# Altium PCB STM_System_Board.PCBDOC (part 5 of 16)
Units mm, origin at the board's own origin, x right, y up, seen from the top; angles counter-clockwise.
Board outline 222.53 x 100.01 mm, 6 copper layers (Top Layer, Int1 (GND), Int2 (Sign), Layer 1, Layer 2, Bottom Layer), stack 1.526 mm thick; 702 components, 774 nets, 3596 pads, 1988 vias.
Unrouted connection lines stored in the file: 1.
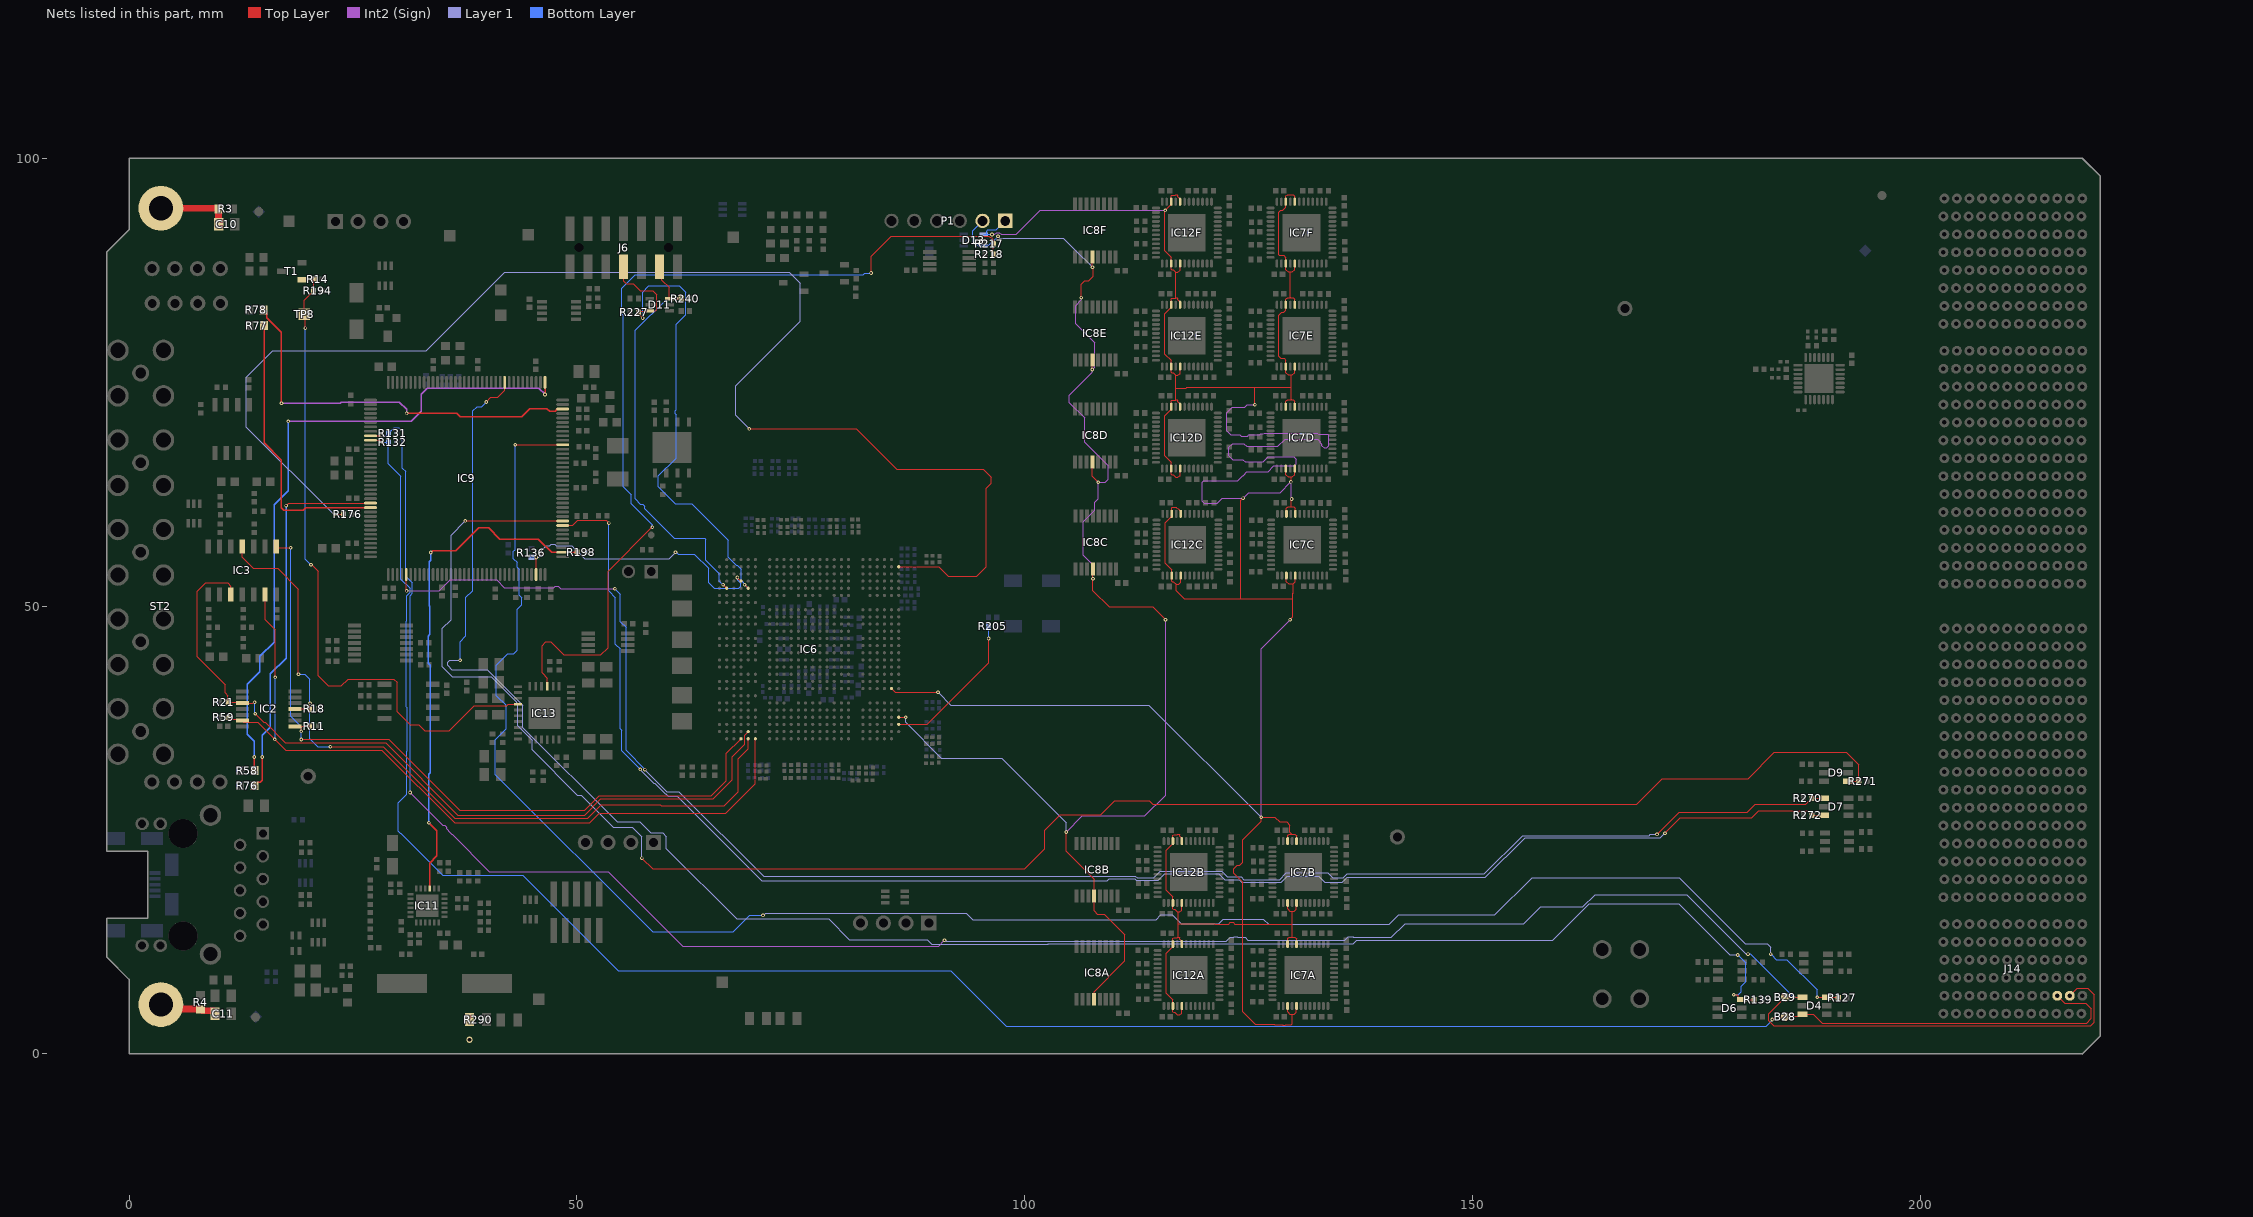
[diagram p8: the nets of this part, all layers, seen from the top]

## Via types
v1: diameter 0.4, hole 0.2, Top Layer to Bottom Layer, tented both sides, 1806 vias
v2: diameter 0.7, hole 0.4, Top Layer to Bottom Layer, tented both sides, 92 vias
v3: diameter 0.7, hole 0.4, Top Layer to Bottom Layer, 90 vias

## Nets (pads, with @x,y where several pads share a name; then routed paths per layer and width w, separated by ;. In a path a pad name is that pad's centre, name@x,y a point inside that pad or via, vN(x,y) a via of type N, cw(c..) or ccw(c..) an arc to the next point about the centre after c; other vN are vias at no path point) (continued)
CFG_TDO: D11.6 IC6.AB5 J6.8 R227.1 | length 58.9
  Top Layer w0.127: J6.8@55.213,87.882 55.213,86.265 55.499,85.979 56.261,85.979 57.04,85.2 58.438,85.2 58.9,84.738 58.9,83.1 58.782,82.982 D11.6@58.129,82.982 ; v1(57.325,82.15) 57.072,82.403 57.072,82.59 R227.1@56.858,82.804 56.985,82.931 D11.6@57.88,82.931 ; D11.6@57.794,82.845 D11.6@57.88,82.931 ; v1(68.715,52.384) IC6.AB5@69.115,51.984 ; D11.6@57.88,82.931 58.078,82.931 D11.6@58.129,82.982 ; D11.6@57.88,82.931 57.931,82.982 D11.6@58.129,82.982
  Bottom Layer w0.127: v1(57.325,82.15) 57.325,85.05 58,85.725 61.425,85.725 62.15,85 62.15,82.525 61.087,81.462 61.087,71.904 60.973,71.79 60.973,71.466 61.087,71.352 61.087,66.512 59.1,64.525 59.1,63.293 60.985,61.409 62.817,61.409 66.88,57.345 66.88,55.47 67.775,54.575 67.876,54.575 68.163,54.288 68.324,54.127 68.324,52.886 68.559,52.651 68.559,52.613 68.715,52.458 v1(68.715,52.384)
CFG_TMS: D11.3 IC6.AE5 J6.4 R240.2 | length 46.6
  Top Layer w0.127: J6.4@59.213,87.882 59.459,87.637 59.459,86.391 60.275,85.575 60.275,84.336 D11.3@60.329,84.282 61.587,84.282 R240.2@61.633,84.328 ; v1(66.315,52.384) IC6.AE5@66.715,51.984
  Bottom Layer w0.127: v1(61.087,84.328) 60.055,84.328 56.5,80.773 56.5,61.95 57.068,61.382 57.35,61.382 57.578,61.153 57.578,60.872 60.882,57.568 64.252,57.568 64.375,57.445 64.375,55.125 65.905,53.595 65.905,52.794 v1(66.315,52.384)
CHASSIS: C10.1 C11.1 R3.2 R4.2 R290.2 ST2.0 ST2.1 | length 14.8
  Top Layer w0.762: ST2.0@3.556,5.512 4.049,5.019 7.931,5.019 R4.2@8,4.95 8.05,4.95 8.181,4.819 9.456,4.819 9.6,4.675 C11.1@9.6,4.5 ; ST2.1@3.556,94.412 9.926,94.412 9.995,94.343 R3.2@9.995,94.336 ; C10.1@9.996,92.609 R3.2@9.995,94.336
  other v2: 38.005,1.575
CLK_FPGA: IC6.A24 R205.2 | length 17
  Top Layer w0.127: IC6.A24@85.915,36.784 89.075,36.784 95.95,43.659 v1(95.95,46.375)
  Bottom Layer w0.127: R205.2@95.945,47.747 95.945,46.38 v1(95.95,46.375)
CLK_STM: IC6.A2 R176.1 | length 157.7
  Top Layer w0.127: v1(23.05,60.25) R176.1@23.93,60.25 ; v1(69.225,69.775) 69.25,69.8 81.175,69.8 85.7,65.275 95.376,65.275 96.266,64.385 96.266,63.716 95.675,63.125 95.675,54.4 94.84,53.565 94.84,53.538 94.612,53.309 94.288,53.309 94.273,53.325 91.425,53.325 90.366,54.384 IC6.A2@85.915,54.384
  Layer 1 w0.127: v1(23.05,60.25) 23.026,60.274 22.776,60.274 13.075,69.975 13.075,75.525 16.05,78.5 33.15,78.5 41.925,87.275 73.675,87.275 74.925,86.025 74.925,81.775 67.725,74.575 67.725,71.275 v1(69.225,69.775)
CPCIS_BUS_PRST_N: D6.3 IC9.46 R139.1 | length 207.3
  Top Layer w0.127: v1(39.878,72.771) 40.386,73.279 41.148,73.279 41.935,74.066 IC9.46@41.935,74.971 ; v1(179.125,6.6) 179.495,6.6 179.604,6.491 179.604,6.312 179.84,6.075 R139.1@181.403,6.075
  Layer 1 w0.127: v1(36.957,43.942) 36.948,43.951 35.779,43.951 35.551,43.723 35.551,43.399 36.046,42.904 39.98,42.904 43.971,38.913 43.971,36.429 54.504,25.896 56.988,25.896 58.209,24.675 59.55,24.675 59.975,24.25 59.975,22.909 67.812,15.072 78.078,15.072 80.375,12.775 89.1,12.775 89.616,12.259 102.596,12.259 102.628,12.291 136.637,12.291 137.047,12.7 158.928,12.7 162.992,16.764 172.974,16.764 178.689,11.049 v1(179.578,11.049)
  Bottom Layer w0.127: v1(36.957,43.942) 36.957,46.032 37.6,46.675 37.6,50.957 38.354,51.711 38.354,53.213 38.39,53.249 38.39,71.791 38.862,72.263 39.37,72.263 v1(39.878,72.771) ; v1(179.125,6.6) 179.612,6.6 179.959,6.947 179.959,7.566 180.467,8.074 180.467,10.16 v1(179.578,11.049)
CPCIS_BUS_RST_N: D4.6 IC9.26 R127.1 | length 213.2
  Top Layer w0.127: v1(43.104,67.996) IC9.26@48.41,67.996 ; v1(188.437,6.318) D4.6@189.511,6.318 190.741,6.318 R127.1@190.791,6.268
  Layer 1 w0.127: v1(70.764,15.462) 70.835,15.462 71.073,15.7 93.444,15.7 94.154,14.99 114.662,14.99 115.188,15.516 116.434,15.516 117.434,14.516 121.616,14.516 122.125,15.025 126.625,15.025 127.197,14.453 140.665,14.453 141.757,15.545 152.476,15.545 156.616,19.685 173.036,19.685 180.402,12.319 182.88,12.319 183.261,11.938 v1(183.261,11.141)
  Bottom Layer w0.127: v1(43.104,67.996) 43.105,67.995 43.105,56.301 42.9,56.096 42.9,55.29 43.326,54.864 43.326,54.344 43.546,54.124 43.546,51.395 43.561,51.38 43.561,51.181 43.815,50.927 43.815,50.165 43.307,49.657 43.307,45.06 42.947,44.7 42.283,44.7 40.996,43.412 40.996,40.004 42.1,38.9 42.1,36.3 40.9,35.1 40.9,31.153 58.439,13.614 67.439,13.614 69.287,15.462 v1(70.764,15.462) ; v1(183.261,11.141) 183.296,11.141 183.896,10.541 185.039,10.541 188.437,7.143 v1(188.437,6.318)
CPCIS_I2C_SCL: B29.1 D4.1 IC9.81 J14.B2 R131.2 | length 262.8
  Top Layer w0.127: IC9.81@26.96,68.996 28.153,68.996 v1(28.169,69.012) ; D4.1@186.811,6.318 v1(185.836,6.318) B29.1@184.861,6.318 183.035,4.492 183.035,3.688 183.573,3.15 218.973,3.15 219.354,3.531 219.354,6.629 218.643,7.341 217.479,7.341 J14.B2@216.639,6.5
  Int2 (Sign) w0.127: v1(31.369,29.185) 35.017,25.536 35.214,25.536 35.442,25.308 35.442,25.111 35.805,24.749 35.805,24.73 36.033,24.502 36.052,24.502 40.234,20.32 53.518,20.32 61.798,12.04 90.365,12.04 v1(91.025,12.7)
  Layer 1 w0.127: v1(91.025,12.7) 91.099,12.7 91.228,12.571 122.502,12.571 122.936,13.005 123.309,13.005 123.376,13.072 123.699,13.072 123.766,13.005 124.587,13.005 124.892,12.7 135.712,12.7 136.084,13.072 136.637,13.072 136.679,13.03 140.919,13.03 142.443,14.554 155.702,14.554 157.556,16.408 162.277,16.408 163.649,17.78 173.863,17.78 180.467,11.176 180.686,11.176 v1(180.721,11.141)
  Bottom Layer w0.127: v1(28.169,69.012) 28.678,69.012 28.708,69.042 28.728,69.042 28.954,69.268 R131.2@28.954,69.288 28.954,69.308 29.181,69.535 29.201,69.535 29.592,69.926 30.126,69.926 30.48,69.572 30.48,65.405 30.861,65.024 30.861,53.34 31.623,52.578 31.623,51.422 31.369,51.168 v1(31.369,29.185) ; v1(180.721,11.141) 180.756,11.176 180.978,11.176 v1(185.836,6.318)
CPCIS_I2C_SDA: B28.1 D4.3 IC9.82 J14.C2 R132.2 | length 251.8
  Top Layer w0.127: IC9.82@26.96,68.496 28.024,68.496 28.229,68.292 v1(28.235,68.292) ; v1(183.425,3.85) 183.743,4.168 185.788,4.168 185.801,4.182 186.575,4.182 D4.3@186.811,4.418 188.021,4.418 188.985,3.454 218.516,3.454 219.024,3.962 219.024,5.029 218.415,5.639 216.1,5.639 J14.C2@215.239,6.5
  Bottom Layer w0.127: v1@28.228,68.292 v1(28.235,68.292) 28.239,68.288 R132.2@28.954,68.288 28.954,65.864 30.353,64.465 30.353,53.003 31.369,51.987 31.369,51.527 30.997,51.156 30.997,48.352 30.963,48.317 30.963,38.772 31.047,38.687 31.047,33.864 30.979,33.795 30.979,28.972 30.064,28.058 30.064,24.857 30.293,24.629 30.341,24.629 33.162,21.808 35.03,19.939 43.967,19.939 54.635,9.271 91.745,9.271 97.942,3.073 182.748,3.073 183.326,3.651 183.326,3.677 183.425,3.776 v1(183.425,3.85)
CPU_RESETn: IC13.26 R14.2 R194.1 T1.1 TP8.1 | length 75.4
  Top Layer w0.127: T1.1@19.311,86.426 20.551,86.426 R14.2@20.612,86.487 20.612,85.226 R194.1@20.597,85.21 20.597,85.19 19.558,84.152 TP8.1@19.558,82.55 19.685,82.423 v1(19.685,81.026) ; v1(20.311,54.61) 20.384,54.61 21.107,53.887 21.107,42.221 22.239,41.089 23.714,41.089 24.475,41.85 29.55,41.85 29.925,41.475 29.925,38.205 31.38,36.75 32.325,36.75 33.025,36.05 35.725,36.05 38.537,38.862 42.164,38.862 42.352,39.05 IC13.26@43.409,39.05
  Bottom Layer w0.127: v1(19.685,81.026) 19.685,55.236 v1(20.311,54.61)
CS: D13.3 IC6.A23 IC8A.12 IC8B.12 IC8C.12 IC8D.12 IC8E.12 IC8F.12 P1.2 | length 157
  Top Layer w0.127: IC6.A23@85.915,37.584 v1(86.7,37.584) ; v1(104.625,24.775) 104.625,22.629 107.725,19.529 IC8B.12@107.725,17.606 107.725,15.973 108.077,15.621 108.854,15.621 111.175,13.3 111.175,10.4 107.725,6.95 IC8A.12@107.725,6.106 ; v1(106.3,84.431) 106.3,85.925 106.685,86.31 107.138,86.31 107.625,86.797 107.625,87.614 ; IC8D.12@107.529,66.094 107.529,64.496 v1(108.2,63.825) ; v1@107.529,76.404 IC8E.12@107.529,77.479 ; IC8F.12@107.529,88.979 107.529,87.846 v1(107.55,87.825) ; v1@107.594,53.05 107.594,51.731 109.425,49.9 114.275,49.9 v1(115.7,48.475) ; v1@107.594,53.056 IC8C.12@107.594,54.146
  Int2 (Sign) w0.127: v1(104.625,24.775) 106.425,26.575 113.4,26.575 115.7,28.875 v1(115.7,48.475) ; v1(106.3,84.431) 106.3,84.175 105.65,83.525 105.65,81.5 107.788,79.363 107.788,76.663 v1(107.525,76.4) 107.525,76.075 104.975,73.525 104.975,72.7 106.675,71 106.675,68.3 109.3,65.675 109.3,64.15 108.975,63.825 v1(108.2,63.825) 108.204,63.821 108.204,61.951 107.825,61.572 107.825,60.683 106.528,59.385 106.528,55.651 107.594,54.585 v1@107.594,53.052
  Layer 1 w0.127: v1(86.7,37.584) 86.7,37 90.675,33.025 97.4,33.025 104.625,25.8 v1(104.625,24.775) ; v1@96.996,91.271 97.192,91.075 104.298,91.075 105.464,89.908 105.467,89.908 v1(107.55,87.825)
  Bottom Layer w0.127: P1.2@95.275,92.992 94.185,91.901 94.185,90.688 94.413,90.46 94.59,90.46 94.809,90.241 95.359,90.241 D13.3@95.4,90.2 95.466,90.266 95.991,90.266 v1(97,91.275)
  other v1: 107.6,53.05
DIO_OEn0: IC2.1 IC3.1 IC6.AC26 R11.2 | length 83.3
  Top Layer w0.127: IC3.1@16.451,56.666 16.602,56.515 v1(18.034,56.515) ; IC2.1@18.539,36.556 IC2.1@19.039,36.556 ; v1(19.215,35.105) 29.016,35.105 36.943,27.178 50.854,27.178 52.505,28.829 65.006,28.829 66.689,30.511 66.689,33.558 IC6.AC26@68.315,35.184 ; v1(19.215,36) 19.201,36.014 19.201,36.394 IC2.1@19.039,36.556 ; R11.2@20.199,36.601 20.154,36.556 IC2.1@19.039,36.556
  Bottom Layer w0.127: v1(18.034,56.515) 18.034,37.719 19.215,36.538 v1(19.215,36) v1(19.215,35.105)
DIO_OEn1: IC2.4 IC3.4 IC6.AB26 R18.2 | length 88.1
  Top Layer w0.127: IC3.4@12.641,56.666 12.641,55.431 13.843,54.229 16.574,54.229 18.913,51.89 v1(18.913,42.386) ; IC2.4@18.539,38.506 R18.2@20.199,38.506 v1(20.199,39.156) ; v1(22.479,34.29) 28.373,34.29 36.374,26.289 51.205,26.289 52.738,27.822 59.322,27.822 59.435,27.71 66.439,27.71 67.977,29.248 67.977,32.927 69.115,34.065 IC6.AB26@69.115,35.184
  Bottom Layer w0.127: v1(18.913,42.386) 19.621,42.386 20.199,41.808 v1(20.199,39.156) 20.199,35.173 21.082,34.29 v1(22.479,34.29)
DIO_OEn2: IC2.10 IC3.10 IC6.AB25 R21.2 | length 89.1
  Top Layer w0.127: IC3.10@11.371,51.266 11.371,52.231 11.024,52.578 8.565,52.578 7.62,51.633 7.62,44.323 10.732,41.211 10.732,40.32 11.044,40.008 R21.2@11.044,39.268 12.527,39.268 IC2.10@12.639,39.156 13.827,39.156 13.937,39.266 v1(14.011,39.266) ; v1(14.097,37.973) 15.042,37.028 15.181,37.028 17.449,34.76 18.23,34.76 18.276,34.715 28.652,34.715 36.697,26.67 50.854,26.67 52.675,28.491 65.22,28.491 67.327,30.598 67.327,33.152 68.725,34.55 68.725,35.594 IC6.AB25@69.115,35.984
  Bottom Layer w0.127: v1(14.011,39.266) 14.054,39.223 14.054,38.016 v1(14.097,37.973)
DIO_OEn3: IC2.13 IC3.13 IC6.AA26 R59.2 | length 87.3
  Top Layer w0.127: R59.2@11.056,37.577 11.266,37.367 12.478,37.367 IC2.13@12.639,37.206 12.801,37.044 14.344,37.044 17.479,33.909 22.308,33.909 22.317,33.9 22.641,33.9 22.65,33.909 28.206,33.909 36.334,25.781 51.411,25.781 52.478,26.848 66.623,26.848 69.915,30.14 IC6.AA26@69.915,35.184 ; IC3.13@15.181,51.266 15.181,48.474 16.324,47.331 v1(16.324,42.037)
  Bottom Layer w0.127: v1(16.275,35.109) 16.324,35.158 16.324,38.691 16.314,38.7 16.314,39.024 16.324,39.033 v1(16.324,42.037)
DONE: IC6.AC4 IC9.142 R136.2 | length 31.5
  Top Layer w0.127: IC9.142@45.435,53.521 45.451,53.537 45.451,55.406 v1(45.465,55.42) ; v1(67.915,53.184) IC6.AC4@68.315,52.784
  Layer 1 w0.127: v1(45.465,55.42) 45.517,55.472 45.71,55.472 46.002,55.764 46.002,56.177 46.55,56.725 46.973,56.725 47.138,56.89 47.537,56.89 47.702,56.725 49.399,56.725 49.517,56.607 49.518,56.607 50.85,55.275 60.275,55.275 v1(61,56)
  Bottom Layer w0.127: R136.2@44.924,55.449 44.953,55.42 v1(45.465,55.42) ; v1(61,56) 61.074,56 61.282,55.792 63.108,55.792 64.7,54.2 64.7,52.593 65.3,51.994 68.077,51.994 68.305,52.222 68.305,52.546 67.967,52.884 67.967,53.132 v1(67.915,53.184)
EN_PWR: IC13.19 R217.2 R218.2 | length 103.7
  Top Layer w0.127: IC13.19@46.697,41.037 46.697,41.949 46.101,42.545 46.101,45.576 46.525,46 47.1,46 48.519,44.581 49.056,44.581 49.098,44.539 52.667,44.539 53.467,45.339 53.467,53.902 58.366,58.801 v1(58.42,58.801) ; v1(82.829,87.173) 82.829,89.052 85.065,91.288 95.96,91.288 96.163,91.085 96.291,91.085 96.52,90.856 96.52,90.462 R217.2@96.482,90.424 R218.2@96.482,89.281
  Bottom Layer w0.127: v1(58.42,58.801) 58.41,58.811 58.41,59.09 56.075,61.426 56.075,62.401 55.175,63.3 55.175,82.449 54.975,82.649 54.975,85.455 56.515,86.995 81.966,86.995 82.144,87.173 v1(82.829,87.173)
ETH_PHY_NRST: IC9.2 IC11.15 R198.2 | length 57.2
  Top Layer w0.152: v1(33.477,25.806) 34.363,24.921 34.363,22.104 33.553,21.294 IC11.15@33.553,18.461 ; v1(33.673,55.977) 33.74,55.977 33.919,56.156 36.471,56.156 39.043,58.728 40.126,58.728 41.396,57.459 42.479,57.459 42.496,57.476 45.704,57.476 47.184,55.996 IC9.2@48.41,55.996 50.006,55.996 R198.2@50.012,56.002
  Bottom Layer w0.152: v1(33.477,25.806) 33.477,31.221 33.619,31.363 33.619,43.379 33.388,43.61 33.388,46.652 33.56,46.823 33.56,49.956 33.496,50.02 33.496,54.955 33.673,55.132 v1(33.673,55.977)
F_IO0: D7.6 IC9.8 R272.1 | length 176.8
  Top Layer w0.127: IC9.8@48.41,58.996 49.552,58.996 50.105,59.55 50.383,59.55 50.396,59.563 50.572,59.563 50.585,59.55 53.277,59.55 v1(53.569,59.258) ; v1(171.45,24.638) 173.162,26.35 181.163,26.35 181.943,27.13 187.358,27.13 187.839,26.65 R272.1@187.839,26.63 D7.6@189.219,26.63
  Layer 1 w0.127: v1(57.055,31.763) 57.055,31.718 58.554,30.218 58.682,30.218 59.861,29.039 59.928,29.039 60.182,28.785 61.174,28.785 70.612,19.348 109.176,19.348 109.408,19.579 112.256,19.579 112.436,19.399 114.91,19.399 115.627,20.117 121.622,20.117 122.289,19.45 123.908,19.45 124.192,19.166 124.922,19.166 ; 124.922,19.167 128.59,19.167 129.286,19.863 132.781,19.863 133.477,19.167 133.723,19.167 ; 133.724,19.166 135.422,19.166 135.975,19.719 137.493,19.719 137.505,19.707 151.406,19.707 155.829,24.13 167.64,24.13 167.649,24.121 170.933,24.121 v1(171.45,24.638)
  Bottom Layer w0.127: v1@53.569,59.246 53.569,51.681 54.3,50.95 54.3,45.75 54.825,45.225 54.825,36.325 55,36.15 55,33.817 v1(57.055,31.763)
F_IO1: D9.4 IC9.9 R271.1 | length 209.6
  Top Layer w0.127: v1(37.532,59.496) IC9.9@48.41,59.496 ; v1(57.25,21.86) 58.435,20.675 99.975,20.675 102.2,22.9 102.2,24.975 103.95,26.725 108.475,26.725 110.025,28.275 113.875,28.275 114.25,27.9 168.325,27.9 171.169,30.744 180.731,30.744 183.637,33.65 191.699,33.65 193.079,32.27 R271.1@193.079,30.431 D9.4@191.899,30.431
  Layer 1 w0.127: v1(37.532,59.496) 35.941,57.906 35.941,48.489 34.966,47.513 34.966,43.216 36.068,42.113 40.411,42.113 43.053,39.472 43.409,39.116 43.409,36.632 45.014,35.027 45.014,33.936 50.049,28.901 50.474,28.901 54.063,25.312 56.163,25.312 57.25,24.225 v1(57.25,21.86)
F_RST: D7.4 IC9.113 R270.1 | length 189.3
  Top Layer w0.127: IC9.113@30.935,53.521 30.962,53.495 30.962,51.706 v1(30.979,51.689) ; v1(170.561,24.511) 173.025,26.975 180.645,26.975 181.52,27.85 187.179,27.85 187.839,28.51 R270.1@187.839,28.53 D7.4@189.219,28.53
  Int2 (Sign) w0.127: v1(30.979,51.689) 30.988,51.68 34.605,51.68 35.857,52.932 41.025,52.932 41.905,52.052 47.436,52.052 47.59,52.206 47.914,52.206 48.177,51.943 54.229,51.943 v1(54.234,51.938)
  Layer 1 w0.127: v1(57.581,31.744) 60.031,29.293 61.385,29.293 70.822,19.856 112.339,19.856 112.541,19.653 114.379,19.653 115.096,20.371 121.971,20.371 122.567,19.775 124.15,19.775 124.454,19.471 128.449,19.471 129.196,20.218 133.833,20.218 134.366,19.685 135.56,19.685 135.966,20.091 151.282,20.091 155.575,24.384 169.694,24.384 169.821,24.511 v1(170.561,24.511)
  Bottom Layer w0.127: v1(54.234,51.938) 54.234,51.929 54.85,51.313 54.85,48.25 55.475,47.625 55.475,33.894 57.581,31.788 v1(57.581,31.744)
FP_LED_0: IC9.37 R58.2 | length 74.2
  Top Layer w0.152: v1(13.97,33.147) 13.97,31.666 R58.2@14.011,31.625 ; v1(46.435,73.613) IC9.37@46.435,74.971
  Int2 (Sign) w0.152: v1(17.78,70.612) 31.496,70.612 32.639,71.755 32.639,73.66 33.282,74.303 45.745,74.303 v1(46.435,73.613)
  Bottom Layer w0.152: v1(13.97,33.147) 13.97,34.925 13.208,35.687 13.208,41.275 14.605,42.672 14.605,44.388 16.193,45.976 16.193,61.278 17.78,62.865 v1(17.78,70.612)
FP_LED_1: IC9.96 R76.2 | length 42.5
  Top Layer w0.127: v1(17.526,61.214) 17.808,61.496 IC9.96@26.96,61.496
  Top Layer w0.152: R76.2@13.992,29.94 13.992,29.979 14.366,30.353 14.643,30.353 14.859,30.569 v1(14.859,33.147)
  Bottom Layer w0.152: v1(14.859,33.147) 14.859,35.56 15.748,36.449 15.748,42.418 17.526,44.196 v1(17.526,61.214)
FP_LED_2: IC9.97 R77.2 | length 31.3
  Top Layer w0.152: R77.2@15.067,81.295 15.067,68.245 17.018,66.294 17.018,60.96 17.272,60.706 19.431,60.706 19.721,60.996 IC9.97@26.96,60.996
FP_LED_3: IC9.34 R78.2 | length 44.3
  Top Layer w0.152: R78.2@15.024,83.058 15.398,82.684 15.398,82.202 17.018,80.581 v1(17.018,72.644) ; v1(30.988,71.501) 31.01,71.523 36.576,71.523 36.979,71.12 43.815,71.12 44.726,72.031 46.647,72.031 46.946,71.733 47.563,71.733 47.827,71.996 IC9.34@48.41,71.996
  Int2 (Sign) w0.152: v1(17.018,72.644) 23.556,72.644 23.687,72.775 30.157,72.775 30.988,71.944 v1(30.988,71.501)
FSEN: D13.1 IC6.B19 IC7A.20 IC7A.22 IC7A.39 IC7A.41 IC7B.20 IC7B.22 IC7B.39 IC7B.41 IC7C.20 IC7C.22 IC7C.39 IC7C.41 IC7D.20 IC7D.22 IC7D.39 IC7D.41 IC7E.20 IC7E.22 IC7E.39 IC7E.41 IC7F.20 IC7F.22 IC7F.39 IC7F.41 IC12A.20 IC12A.22 IC12A.39 IC12A.41 IC12B.20 IC12B.22 IC12B.39 IC12B.41 IC12C.20 IC12C.22 IC12C.39 IC12C.41 IC12D.20 IC12D.22 IC12D.39 IC12D.41 IC12E.20 IC12E.22 IC12E.39 IC12E.41 IC12F.20 IC12F.22 IC12F.39 IC12F.41 P1.1 | length 393.5
  Top Layer w0.127: IC6.B19@85.115,40.784 85.506,40.393 89.583,40.393 89.592,40.384 v1(90.305,40.384) ; IC12D.41@117.329,65.344 117.329,64.55 117.286,64.55 117.09,64.354 116.829,64.354 116.538,64.644 116.403,64.644 116.329,64.719 IC12D.39@116.329,65.344 116.329,66.022 115.604,66.747 115.604,71.219 116.329,71.944 IC12D.22@116.329,72.244 116.329,72.894 116.403,72.969 116.811,72.969 116.829,72.987 ; IC12D.20@117.329,72.244 117.329,72.549 117.09,72.787 117.09,72.932 117.016,73.006 116.848,73.006 116.829,72.987 ; IC12E.41@117.329,76.729 117.329,75.935 117.286,75.935 117.09,75.738 116.829,75.738 ; IC12E.20@117.329,83.629 117.329,83.934 117.09,84.172 117.09,84.317 117.016,84.391 116.848,84.391 116.829,84.372 ; IC12F.41@117.329,88.229 117.329,87.477 117.09,87.238 116.829,87.238 ; IC12F.20@117.329,95.129 117.329,95.434 117.09,95.672 117.09,95.817 117.016,95.891 116.848,95.891 116.811,95.854 116.403,95.854 116.329,95.779 IC12F.22@116.329,95.129 116.329,94.829 v1(115.664,94.165) 115.604,94.104 115.604,89.632 116.329,88.907 IC12F.39@116.329,88.229 116.329,87.604 116.403,87.529 116.538,87.529 116.829,87.238 ; IC12C.41@117.394,53.396 117.394,52.644 117.155,52.405 116.876,52.405 ; IC12C.20@117.394,60.296 117.394,60.601 117.13,60.865 117.107,60.865 117.035,60.937 116.96,60.937 116.876,61.021 116.468,61.021 116.394,60.946 IC12C.22@116.394,60.296 116.394,59.996 115.669,59.271 115.669,54.799 116.394,54.074 IC12C.39@116.394,53.396 116.394,52.771 116.468,52.696 116.585,52.696 116.876,52.405 ; IC12A.41@117.525,5.356 117.525,4.562 117.483,4.562 117.286,4.366 117.025,4.366 116.734,4.656 116.599,4.656 116.525,4.731 IC12A.39@116.525,5.356 116.525,6.034 115.8,6.759 115.8,11.231 116.525,11.956 IC12A.22@116.525,12.256 116.525,12.907 116.599,12.981 117.007,12.981 117.044,13.018 ; IC12A.20@117.525,12.256 117.525,12.561 117.286,12.799 117.286,12.944 117.212,13.018 117.044,13.018 ; IC12B.41@117.525,16.856 117.525,16.062 117.483,16.062 117.286,15.866 117.119,15.866 ; IC12B.20@117.525,23.756 117.525,24.061 117.286,24.299 117.286,24.444 117.212,24.518 117.044,24.518 117.007,24.481 116.599,24.481 116.525,24.407 IC12B.22@116.525,23.756 116.525,23.456 115.8,22.731 115.8,18.259 116.525,17.534 IC12B.39@116.525,16.856 116.525,16.231 116.599,16.156 116.734,16.156 117.025,15.866 117.119,15.866 ; v1(124.358,62.052) 124.104,61.798 124.104,50.8 ; v1(125.679,72.466) 125.679,74.346 125.603,74.422 ; IC7D.39@129.129,65.344 129.129,64.674 129.394,64.409 129.71,64.409 ; IC7D.22@129.129,72.244 129.129,72.885 129.212,72.968 129.283,72.968 129.341,73.027 129.794,73.027 ; IC7C.39@129.194,53.396 129.194,52.726 129.459,52.461 129.934,52.461 ; IC7C.22@129.194,60.296 129.194,60.937 129.277,61.02 129.348,61.02 129.406,61.079 129.743,61.079 ; IC7A.39@129.325,5.356 129.325,4.686 129.59,4.421 129.819,4.421 ; IC7A.22@129.325,12.256 129.325,12.897 129.408,12.98 129.479,12.98 129.537,13.039 129.819,13.039 ; IC7B.39@129.325,16.856 129.325,16.186 129.59,15.921 129.845,15.921 ; IC7B.22@129.325,23.756 129.325,24.397 129.408,24.48 129.479,24.48 129.537,24.539 129.794,24.539 ; v1(129.6,48.475) 129.921,48.796 129.921,51.435 129.934,51.448 129.934,52.461 ; v1(129.692,63.856) 129.71,63.873 129.71,64.409 ; v1(129.769,61.951) 129.743,61.925 129.743,61.079 ; 129.921,50.8 124.104,50.8 ; IC7D.41@130.129,65.344 130.117,65.332 130.117,64.657 129.869,64.409 129.71,64.409 ; IC7D.20@130.129,72.244 130.129,72.842 129.944,73.027 129.794,73.027 ; IC7E.41@130.129,76.729 130.117,76.717 130.117,76.042 129.869,75.794 129.718,75.794 ; IC7E.20@130.129,83.629 130.129,84.226 129.943,84.412 129.667,84.412 ; IC7F.41@130.129,88.229 130.117,88.217 130.117,87.542 129.869,87.294 129.608,87.294 ; IC7F.20@130.129,95.129 130.129,95.727 129.944,95.912 129.341,95.912 129.283,95.853 129.212,95.853 129.129,95.77 IC7F.22@129.129,95.129 129.129,94.534 128.778,94.183 128.549,94.183 128.321,93.955 128.321,89.203 128.395,89.129 128.88,89.129 129.129,88.879 IC7F.39@129.129,88.229 129.129,87.559 129.394,87.294 129.608,87.294 ; IC7C.41@130.194,53.396 130.182,53.384 130.182,52.709 129.934,52.461 ; IC7C.20@130.194,60.296 130.194,60.894 130.009,61.079 129.743,61.079 ; IC7A.41@130.325,5.356 130.313,5.344 130.313,4.669 130.065,4.421 129.819,4.421 ; IC7A.20@130.325,12.256 130.325,12.854 130.14,13.039 129.819,13.039 ; IC7B.41@130.325,16.856 130.313,16.844 130.313,16.169 130.065,15.921 129.845,15.921 ; IC7B.20@130.325,23.756 130.325,24.354 130.14,24.539 129.794,24.539 ; 116.829,72.987 116.829,74.32 ; 116.829,74.32 116.829,75.738 ; 116.829,74.32 117.992,74.32 118.094,74.422 125.603,74.422 ; 116.829,75.738 116.538,76.029 116.403,76.029 116.329,76.104 IC12E.39@116.329,76.729 116.329,77.407 115.604,78.132 115.604,82.604 116.329,83.329 IC12E.22@116.329,83.629 116.329,84.279 116.403,84.354 116.811,84.354 116.829,84.372 ; 116.829,84.372 116.829,87.238 ; 116.876,52.405 116.876,51.729 117.805,50.8 124.104,50.8 ; 117.044,13.018 117.119,13.093 117.119,14.529 ; 117.119,14.529 121.19,14.529 121.216,14.503 122.757,14.503 122.938,14.684 123.262,14.684 123.443,14.503 124.308,14.503 ; 117.119,14.529 117.119,15.866 ; 124.308,14.503 124.308,19.167 123.3,20.175 123.3,20.65 123.725,21.075 123.967,21.075 124.308,21.416 124.308,23.901 126.375,25.969 v1(126.375,26.425) 127.908,26.425 128.436,25.897 129.212,25.897 129.59,25.518 129.59,24.742 129.794,24.539 ; 124.308,14.503 124.308,4.724 125.728,3.304 127.819,3.304 127.888,3.235 128.757,3.235 128.767,3.226 129.09,3.226 129.143,3.279 129.745,3.279 129.819,3.353 129.819,4.421 ; 124.308,14.503 129.845,14.503 ; 125.603,74.422 129.21,74.422 129.718,74.422 ; 129.608,87.294 129.608,84.47 129.667,84.412 ; 129.667,84.412 129.341,84.412 129.283,84.353 129.212,84.353 129.129,84.27 IC7E.22@129.129,83.629 129.096,83.596 129.096,82.995 128.88,82.779 128.651,82.779 128.321,82.448 128.321,77.902 128.575,77.648 128.93,77.648 129.129,77.449 IC7E.39@129.129,76.729 129.129,76.059 129.394,75.794 129.718,75.794 ; 129.718,74.422 129.718,73.103 129.794,73.027 ; 129.718,74.422 129.718,75.794 ; 129.819,13.039 129.845,13.064 129.845,14.503 ; 129.845,14.503 129.845,15.921
  Int2 (Sign) w0.127: v1(96.325,91.475) 96.648,91.475 96.838,91.665 97.162,91.665 97.352,91.475 99.044,91.475 101.734,94.165 v1(115.664,94.165) ; v1(125.679,72.466) 124.816,72.466 124.543,72.193 123.159,72.193 122.542,71.576 122.542,69.564 123.006,69.1 124.005,69.1 124.128,68.977 124.872,68.977 124.995,69.1 126.193,69.1 126.302,69.208 126.617,69.208 126.719,69.31 132.646,69.31 132.801,69.154 133.79,69.154 133.942,69.002 133.942,67.883 133.713,67.654 133.39,67.654 133.161,67.883 133.161,68.086 132.998,68.25 132.998,68.321 132.681,68.638 129.063,68.638 128.25,67.825 124.75,67.825 124.45,68.125 123.2,68.125 122.775,67.7 122.775,66.8 123.225,66.35 124.325,66.35 124.575,66.1 126.6,66.1 127.15,66.65 130.025,66.65 130.275,66.4 130.275,65.875 130.05,65.65 127.8,65.65 127.15,65 124.775,65 124.601,64.826 124.601,64.778 124.372,64.549 124.324,64.549 123.75,63.975 119.975,63.975 119.8,63.8 119.8,61.7 120.025,61.475 121.475,61.475 122.052,62.052 v1(124.358,62.052) 124.968,62.662 128.499,62.662 v1(129.692,63.856) 129.731,63.817 129.731,61.989 v1(129.769,61.951) ; v1(126.375,26.425) 126.375,45.25 v1(129.6,48.475)
  Layer 1 w0.127: v1(90.305,40.384) 91.739,38.95 113.85,38.95 v1(126.375,26.425)
  Bottom Layer w0.127: v1(96.325,91.475) 95.425,91.475 D13.1@95.4,91.5 95.58,91.5 95.716,91.637 95.716,91.816 95.875,91.975 96.798,91.975 P1.1@97.815,92.992